# Altium PCB PCB2.PcbDoc
Units mil, origin at the board's own origin, x right, y up, seen from the top; angles counter-clockwise.
Board outline 6000 x 4000 mil, 2 copper layers (Top Layer, Bottom Layer); 32 components, 21 nets, 72 pads, 68 vias.
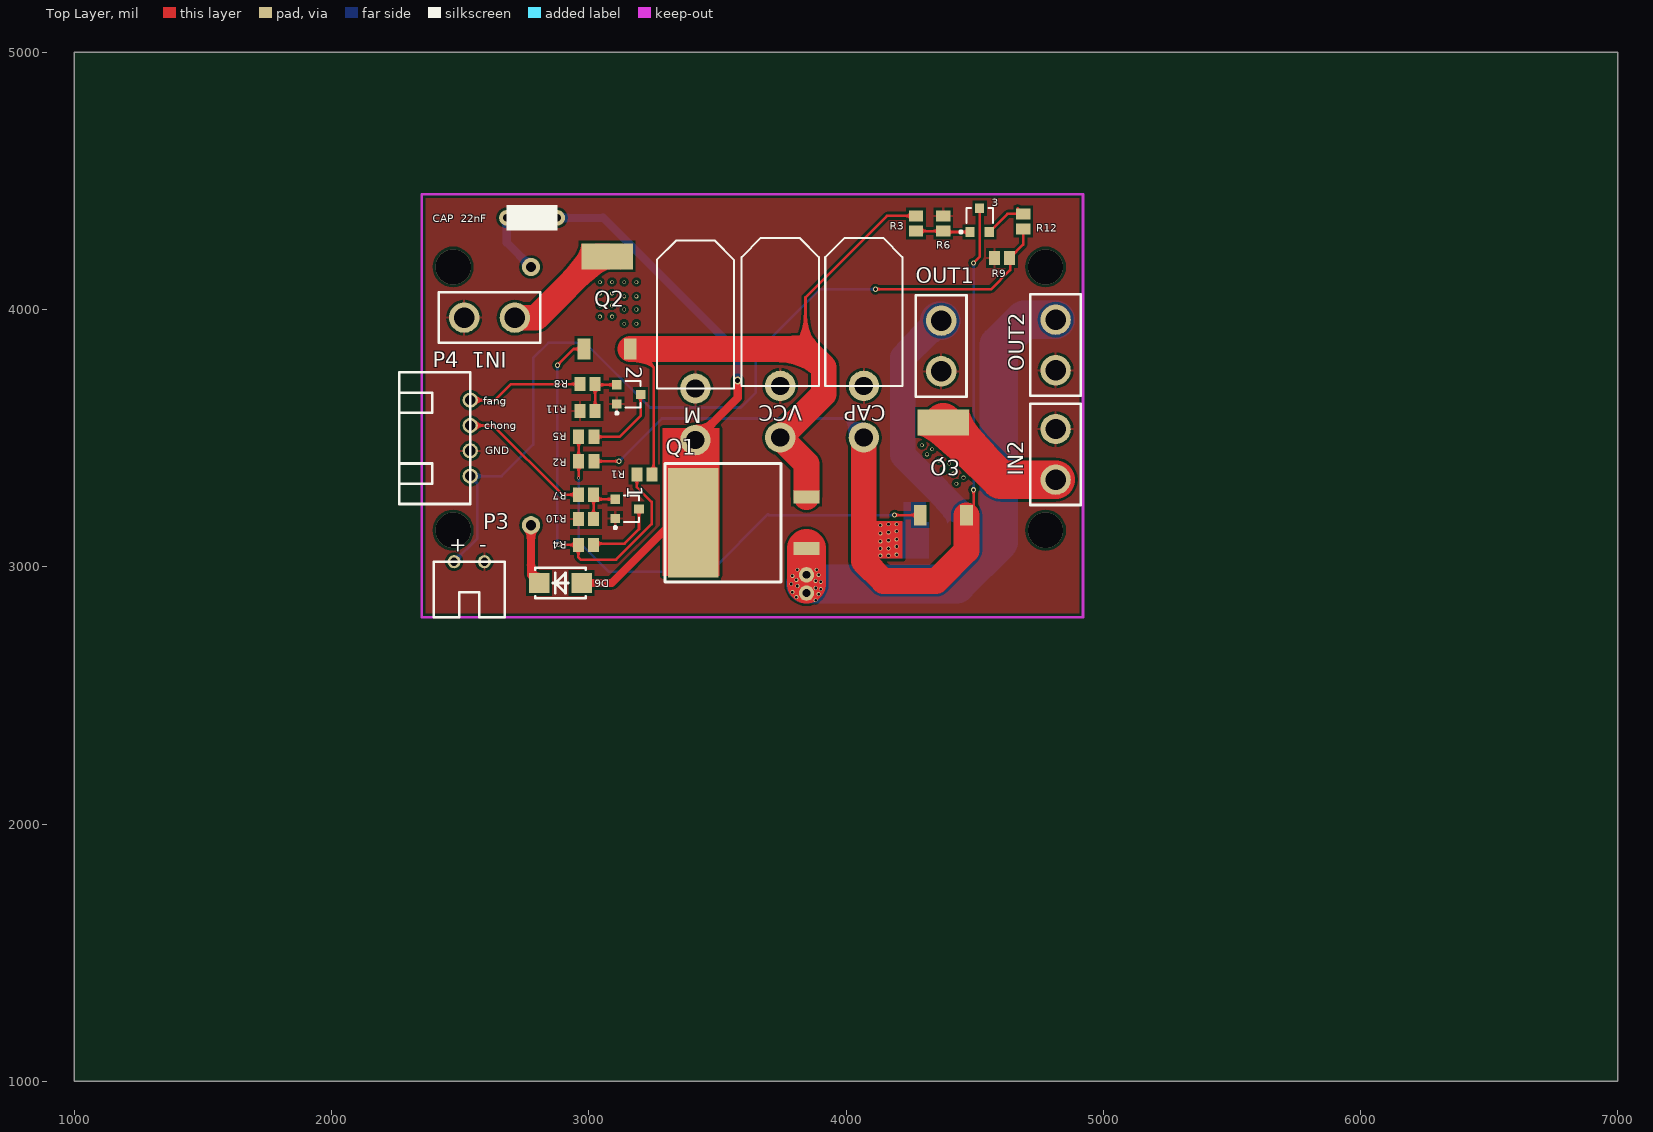
[diagram p0: Top Layer view]
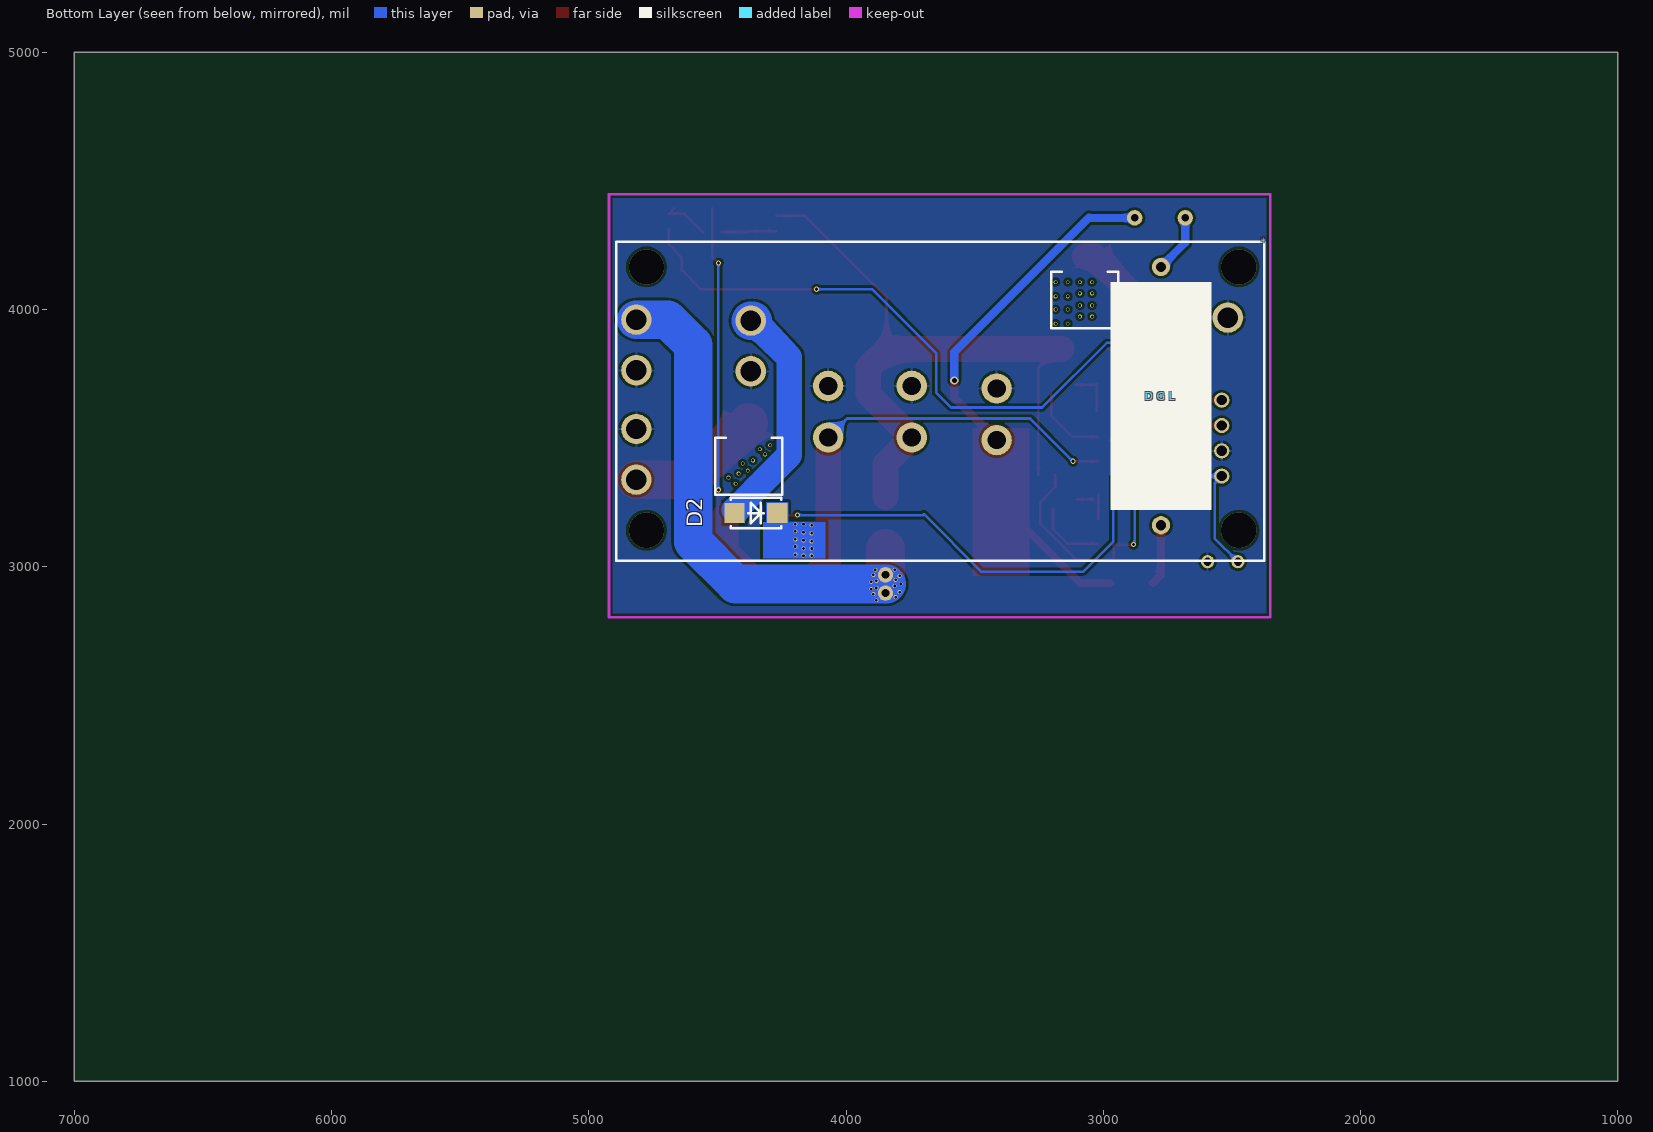
[diagram p1: Bottom Layer view, seen from below]

## Layer stack, top to bottom
Top Solder: solder mask 0.4, Solder Resist, Dk 3.5
Top Layer: signal copper 1.4
Dielectric 1: dielectric 12.6, FR-4, Dk 4.8
Bottom Layer: signal copper 1.4
Bottom Solder: solder mask 0.4, Solder Resist, Dk 3.5

## Board outline
1000,1000 7000,1000 7000,5000 1000,5000

## Design rules (kind name [scope] priority, off if disabled: settings)
Clearance [All] p1: gap=10
PolygonConnect [All] p1: connectstyle=Relief reliefconductorwidth=10 reliefentries=4 polygonreliefangle="90 Angle" airgapwidth=10
RoutingVias [All] p1: holewidth=12 width=20 viastyle="Through Hole" minholewidth=12 minwidth=20 maxholewidth=28 maxwidth=50
SolderMaskExpansion [All] p1: expansion=4
Width [All] p1: maxlimit=300 minlimit=10 preferedwidth=10 minimp=50.000000 maximp=50.000000 favimp=50.000000
30 further rules are at their usual default settings.

## Components (designator, comment, footprint, x,y, rotation, side; value= is the part's Value field where it differs from the comment)
1 "2N3904" SOT-23R#1 3144.09,3225.12 r90 top
2 "2N3904" SOT-23R#1 3150.16,3670.12 r90 top
3 "" SOT-23R#2 4519.69,4342.52 r0 top
* "立柱孔" 立柱孔 2374.02,4263.78 r0 bottom
CAP "" POWER 4069.37,3703.23 r270 top
"CAP  22nF" "直插件" 直插件 2681.1,4307.09 r0 top
D2 "SS54" SMA(DO-214AC)_S2 4350.39,3208.66 r0 bottom
D6 "SS54" SMA(DO-214AC)_S2 2889.76,2937.01 r0 top
"D G L" "5w 200R" 大功率电阻 2578.74,3220.47 r90 bottom
IN1 "" 焊盘2P 2811.02,4066.93 r180 top
IN2 "" 焊盘2P 4913.39,3240.16 r90 top
M "M" POWER 3414.37,3693.23 r270 top
OUT1 "" 焊盘2P 4271.65,4055.12 r270 top
OUT2 "" 焊盘2P 4716.54,4059.06 r270 top
P3 "端口2P" 端口2P 2397.64,2803.15 r0 top
P4 "端口4P" 端口4P 2539.37,3755.91 r270 top
Q1 "MOSFET-P" TO-263 3846.46,3070.87 r90 top
Q2 "MOSFET-P" TO-252 3161.42,3846.46 r180 top
Q3 "MOSFET-P" TO-252 4468.5,3200.79 r180 top
R1 "Res（0402-5205）" 0805 3216.54,3358.27 r0 top
R2 "Res（0402-5205）" 0805 2990.16,3410.12 r0 top
R3 "Res（0402-5205）" 0805 4271.65,4334.65 r90 top
R4 "Res（0402-5205）" 0805 2989.09,3085.12 r180 top
R5 "Res（0402-5205）" 0805 2990.16,3505.12 r180 top
R6 "Res（0402-5205）" 0805 4377.95,4334.65 r90 top
R7 "Res（0402-5205）" 0805 2989.09,3280.12 r180 top
R8 "Res（0402-5205）" 0805 2995.16,3710.12 r180 top
R9 "Res（0402-5205）" 0805 4606.3,4200.79 r0 top
R10 "Res（0402-5205）" 0805 2989.09,3185.12 r180 top
R11 "Res（0402-5205）" 0805 2995.16,3605.12 r180 top
R12 "Res（0402-5205）" 0805 4688.98,4342.52 r90 top
VCC "POWER" POWER 3744.37,3703.23 r270 top

## Footprints (in the part's own frame and the unit in brackets; to place one, negate y for a bottom-side part, rotate by r counter-clockwise, add the part's x,y. Pads: shape width x height; smd on the part's side, far side on the other; paste and mask are expansions set on the pad)
0805 [mm] "Chip Capacitor, Body 2.0x1.3mm, IPC High Density"
  rect 1.1x1.4 smd: 1(-0.75,0) 2(0.75,0)
  body extent -1.1,-0.72 1.1,0.72, height 1.4
POWER [mm]
  round 3 hole 1.8: 1(5.1,0) 2(0,0)
  silkscreen extent -14.6,-3.81 0,3.81
SMA(DO-214AC)_S2 [mm]
  rect 2x2 smd: 1(2.1,0) 2(-2.1,0)
  silkscreen extent -2.5,-1.5 2.5,1.5
SOT-23R#1 [mm]
  rect 0.9x0.95 smd: 1(0.95,1.048) 2(-0.95,1.048) 3(0,-1.302)
  silkscreen extent -1.98,-1.3 1.3,1.17
SOT-23R#2 [mm]
  rect 0.9x0.95 smd: 1(-0.95,-1.048) 2(0,1.302) 3(0.95,-1.048)
  silkscreen extent -1.98,-1.17 1.3,1.3
TO-252 [mil]
  rect 200x100 smd: 1(90,-360)
  rect 50x80 smd: 2(180,0) 3(0,0)
TO-263 [mm]
  rect 10.795x5 smd: 1(2.54,11.2)
  rect 1.27x2.54 smd: 2(0,0) 3(5.08,0)
  silkscreen extent -3.3,2.54 8.38,13.97
大功率电阻 [mm]
  round 1.8 hole 1: 0(-1.5,5) 1(24,5)
  silkscreen extent 0,0 22.5,10
焊盘2P [mm]
  round 3 hole 2: 0(2.5,2.5) 1(7.5,2.5)
  silkscreen extent 0,0 10,5
直插件 [mil]
  round 60 hole 30: 2(0,49.21) 3(196.85,49.21)
  silkscreen extent 0,0 197,98
立柱孔 [mil]
  silkscreen extent 0,0 2520,1240
端口2P [mm]
  round 1.3 hole 0.8: 0(2,5.5) 1(5,5.5)
  silkscreen extent 0,0 7,5.5
端口4P [mm]
  round 1.5 hole 1: 1(2.75,0) 2(5.25,0) 3(7.75,0) 4(10.25,0)
  silkscreen extent 0,-7 13,0

## Part data
1 2: "NPN General Purpose Amplifier"
3: library part 2N3904, "NPN General Purpose Amplifier"
CAP M: library part POWER
D2 D6: library part "D Schottky-SMA", "DO-214AC/SMA"
"D G L": library part 大功率电阻
IN1 IN2 OUT1 OUT2: library part 焊盘2P
Q1 Q2 Q3: "P-Channel MOSFET"
R1 R2 R3 R4 R5 R6 R7 R8 R9 R10 R11 R12: "Resistor"

## Free pads (board coordinates)
  round 60 hole 30: 2(3846.46,2968.5) 3(3846.46,2897.64)

## Via types
v1: diameter 15, hole 10, Top Layer to Bottom Layer, 55 vias
v2: diameter 20, hole 12, Top Layer to Bottom Layer, 7 vias
v3: diameter 137.8, hole 137.8, Top Layer to Bottom Layer, 4 vias
v4: diameter 32, hole 20, Top Layer to Bottom Layer, 1 vias
v5: diameter 12, hole 7, Top Layer to Bottom Layer, 1 vias

## Nets (pads, with @x,y where several pads share a name; then routed paths per layer and width w, separated by ;. In a path a pad name is that pad's centre, name@x,y a point inside that pad or via, vN(x,y) a via of type N, cw(c..) or ccw(c..) an arc to the next point about the centre after c; other vN are vias at no path point)
24V: Q1.3 Q2.3 R1.2 R3.2 VCC.1 | length 2710.7
  Top Layer w10: Q2.3@3181.1,3846.46 3251.97,3775.59 R1.2@3251.97,3358.27 ; 3842.52,3846.46 3842.52,4047.24 4159.45,4364.17 R3.2
  Top Layer w32: Q2.3 3161.42,3866.14 Q2.3@3171.26,3856.3
  Top Layer w100: Q2.3 3181.1,3846.46 3842.52,3846.46 3913.39,3775.59 3913.39,3671.46 VCC.1 3846.46,3400.35 Q1.3
A1: P4.2 R7.2 | length 531.7
  Top Layer w10: P4.2 2627.95,3549.21 2897.05,3280.12 R7.2
A2: P4.1 R8.2 | length 452.1
  Top Layer w10: P4.1 2635.83,3647.64 2698.31,3710.12 R8.2
A3: P3.0 P4.4 R9.2 R12.1 | length 3487.5
  Top Layer w10: v2(4114.17,4078.74) 4562.99,4078.74 4637.8,4153.54 4637.8,4200.79 4688.98,4251.97 R12.1
  Bottom Layer w10: P3.0 2566.93,3110.24 2566.93,3324.8 P4.4 2661.42,3352.36 2783.46,3474.41 2783.46,3811.02 2842.52,3870.08 2986.38,3870.08 3237.28,3619.17 3591.61,3619.17 3649.61,3677.17 3649.61,3830.71 3897.64,4078.74 v2(4114.17,4078.74)
GND: 1.2 2.2 CAP.2 IN1.1 IN2.1 M.2 OUT1.1 OUT2.1 P3.1 P4.3 R6.2 R9.1 R10.2 R11.2 VCC.2
Net1_1: 1.1 R7.1 R10.1 | length 161.6
  Top Layer w10: R10.1 R7.1 ; R7.1@3036.22,3262.52 1.1
Net1_3: 1.3 R4.1 | length 280.8
  Top Layer w10: R4.1 3023.62,3090.12 3139.09,3090.12 3195.35,3146.38 1.3
Net2_1: 2.1 R8.1 R11.1 | length 186.6
  Top Layer w10: R11.1 R8.1 ; R8.1@3027.28,3707.52 2.1
Net2_3: 2.3 R5.1 | length 299.1
  Top Layer w10: R5.1 3120.16,3505.12 3201.42,3586.38 2.3
Net3_1: 3.1 R3.1 R6.1 | length 206.8
  Top Layer w10: R3.1 R6.1 ; R6.1@4381.81,4301.26 3.1
Net3_2: 3.2 CAP.1 D2.2 Q3.3 R2.2 | length 3463.2
  Top Layer w10: R2.2 v2(3117.44,3410.12) ; Q3.3 4496.06,3228.35 v2(4496.06,3299.21) ; v2(4496.06,4181.1) 4519.69,4204.72 3.2
  Top Layer w100: CAP.1 4069.37,3021.18 4145.67,2944.88 4350.39,2944.88 4468.5,3062.99 Q3.3
  Bottom Layer w10: v2(3117.44,3410.12) 3283.82,3576.5 3995.32,3576.5 CAP.1 ; v2(4496.06,3299.21) v2(4496.06,4181.1)
  Bottom Layer w32: 4226.93,3133.86 4227.64,3133.15
  other v1: 4133.86,3043.31 4165.35,3043.31 4196.85,3047.24 4133.86,3070.87 4165.35,3070.87 4196.85,3078.74 4133.86,3098.43 4165.35,3102.36 4196.85,3106.3 4133.86,3129.92 4165.35,3133.86 4196.85,3137.8 4133.86,3161.42 4165.35,3165.35 4196.85,3165.35
Net3_3: 3.3 R12.2 | length 191.9
  Top Layer w10: 3.3 4557.17,4301.26 4627.95,4372.05 R12.2 4667.24,4393.78
"NetCAP  22nF_2": "CAP  22nF.2" "D G L.1" | length 230.1
  Bottom Layer w32: 2681.1,4356.3 2681.1,4259.84 2775.59,4165.35
"NetCAP  22nF_3": "CAP  22nF.3" D6.1 M.1 Q1.1 | length 1796.9
  Top Layer w32: D6.1 3089.37,2937.01 3307.09,3154.72 Q1.1@3307.09,3200.79 ; M.1 3578.74,3656.81 v4(3578.74,3724.41)
  Bottom Layer w32: 2877.95,4356.3 3053.15,4356.3 ; 3055.12,4358.27 3578.74,3834.65 v4(3578.74,3724.41)
NetD2_1: D2.1 OUT1.0 | length 890.3
  Bottom Layer w100: OUT1.0@4363.2,3956.69 4220.47,3813.96 4220.47,3433.07 D2.1@4433.07,3220.47
  Bottom Layer w150: OUT1.0@4363.2,3956.69 OUT1.0
NetD6_2: "D G L.0" D6.2 | length 237.5
  Top Layer w32: 2775.59,3161.42 2775.59,2968.5 D6.2
NetIN1_0: IN1.0 Q2.1 | length 457.4
  Top Layer w100: IN1.0 2795.28,3968.5 3033.23,4206.46 Q2.1
NetIN2_0: IN2.0 Q3.1 | length 528.5
  Top Layer w150: Q3.1 4600.71,3338.58 IN2.0
NetOUT2_0: OUT2.0 pad.2 pad.3 Q1.2 | length 1983.6
  Top Layer w150: 3846.46,2933.07 Q1.2
  Bottom Layer w150: 3842.52,2933.07 4429.69,2933.07 4594.49,3097.87 4594.49,3862.2 4692.91,3960.63 OUT2.0
  other v1: 3881.89,2870.08 3807.09,2881.89 3893.7,2893.7 3791.34,2901.57 3901.57,2913.39 3881.89,2917.32 3811.02,2925.2 3787.4,2933.07 3901.57,2940.94 3881.89,2944.88 3807.09,2948.82 3791.34,2964.57 3893.7,2968.5 3811.02,2988.19 3885.83,2988.19
NetQ2_2: Q2.2 R1.1 R4.2 | length 1516.2
  Top Layer w10: v2(2877.95,3783.46) 2940.94,3846.46 Q2.2 ; v2@2881.89,3085.12 R4.2 2959.57,3036.5 2968.5,3027.56 3106.3,3027.56 3244.09,3165.35 3244.09,3251.97 3187.01,3309.06 R1.1
  Bottom Layer w10: v2(2877.95,3783.46) 2877.95,3090.55 v2(2881.89,3086.61)
NetQ3_2: Q3.2 R2.1 R5.2 | length 1900.2
  Top Layer w10: v5(2960.63,3345.59) R2.1 R5.2 R5.2@2975.16,3490.59 ; v2(4188.98,3200.79) 4284.57,3200.79 Q3.2@4288.5,3204.72
  Bottom Layer w10: v5(2960.63,3345.59) 2960.63,3098.43 3078.74,2980.32 3472.44,2980.32 3696.85,3204.72 3700.79,3200.79 v2(4188.98,3200.79)
copper on no net:
  other v1: 4429.13,3322.83 4456.69,3346.46 4417.32,3362.2 4381.89,3374.02 4401.57,3401.57 4362.2,3413.39 4314.96,3437.01 4334.65,3456.69 4295.28,3472.44 3137.8,3944.88 3185.04,3944.88 3043.31,3972.44 3090.55,3972.44 3137.8,4000 3185.04,4000 3043.31,4015.75 3090.55,4015.75 3137.8,4051.18 3185.04,4051.18 3043.31,4062.99 3090.55,4062.99 3043.31,4106.3 3090.55,4106.3 3137.8,4106.3 3185.04,4106.3
  other v3: 2472.44,3141.73 4775.59,3141.73 2472.44,4165.35 4775.59,4165.35

## Polygon pours and split planes (outlines as drawn)
GND on Top Layer "Top Layer-No Net" (solid, pour order 8): 2350.39,4448.82 4921.26,4448.82 4921.26,2803.15 2350.39,2803.15 2350.39,4448.82
GND on Bottom Layer "Top Layer-No Net" (solid, pour order 10): 2350.39,4448.82 4921.26,4448.82 4921.26,2787.4 4917.32,2783.46 4889.76,2811.02 2350.39,2811.02 2350.39,4448.82

## Keep-outs
Keep-Out Layer:
  lines w10: 2350.39,2803.15 2350.39,4448.82 4921.26,4448.82 4921.26,2803.15 2350.39,2803.15

## Other copper
Top Layer:
  rectangle net Net3_2: 4023.62,3031.5 4220.47,3177.17
  rectangle net "NetCAP  22nF_3": 3287.4,2964.57 3507.87,3539.37
Bottom Layer:
  rectangle net Net3_2: 4224.41,3031.5 4311.02,3251.97
  rectangle net Net3_2: 4078.74,3031.5 4322.83,3173.23

## Silkscreen, mask and mechanical layers (free items; w line width, h text height)
Top Overlay:
  text "fang" at 2590.55,3629.92 h30
  text "chong" at 2593.43,3534.37 h30
  text "GND" at 2598.43,3437.01 h30
Top Solder:
  lines w100: 3414.37,3262.01 3414.37,3492.44 ; 3744.37,3502.44 3846.46,3400.35 3846.46,3270.87 ; 4069.37,3502.44 4069.37,2997.56 4129.92,2937.01 ; 4141.73,2933.07 4334.65,2933.07 4468.5,3066.93 4468.5,3200.79
  lines w150: 3846.46,2937.01 3846.46,3066.93 ; 4378.5,3560.79 4596.77,3342.52 4814.96,3342.52
Bottom Solder:
  lines w150: 3842.52,2937.01 4433.07,2937.01 4594.49,3098.43 4594.49,3858.27 4696.85,3960.63 4822.83,3960.63

## Text inside footprints (layer, text, board x,y; h text height)
P3: Top Overlay "+" at 2456.69,3059.06 h60; Top Overlay "-" at 2574.8,3059.06 h60